# Altium PCB ECEN403.PcbDoc
Units mil, origin at the board's own origin, x right, y up, seen from the top; angles counter-clockwise.
Board outline 3500 x 2500 mil, 2 copper layers (Top Layer, Bottom Layer); 56 components, 33 nets, 154 pads, 31 vias.
Unrouted connection lines stored in the file: 42.
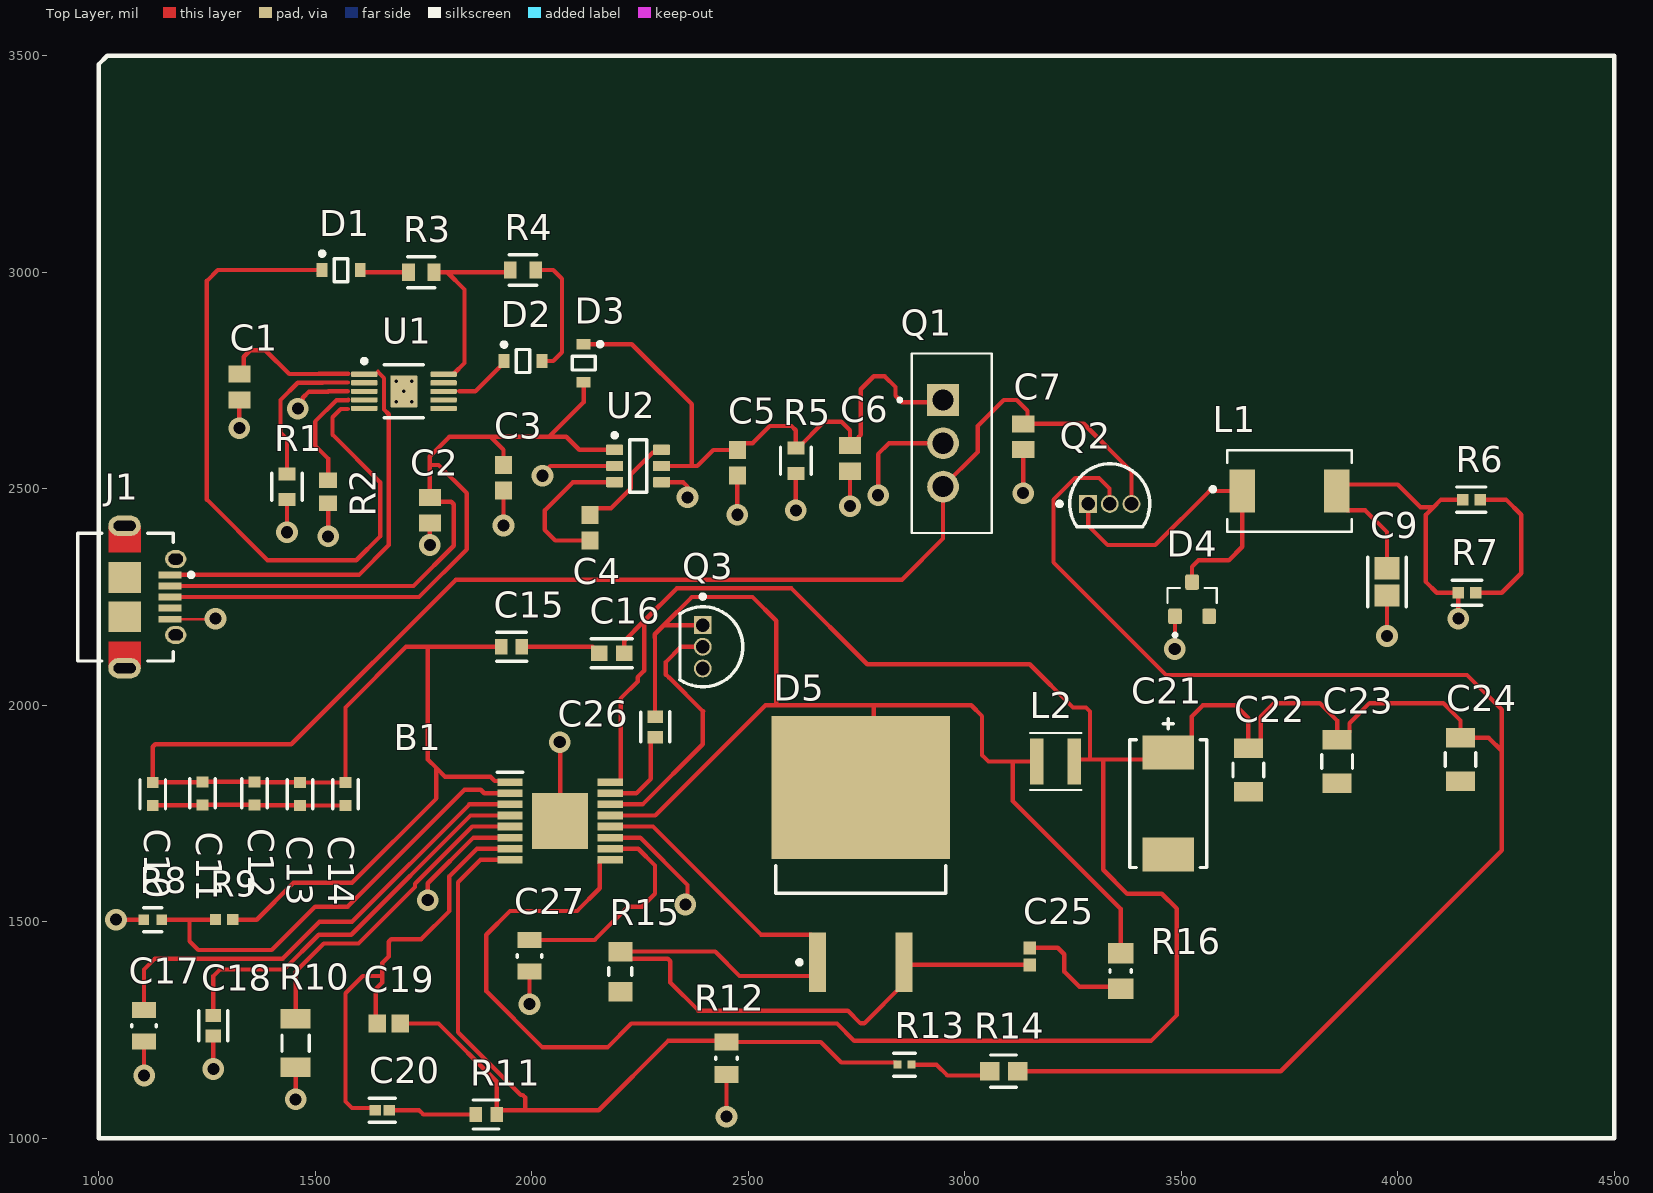
[diagram p0: Top Layer view]
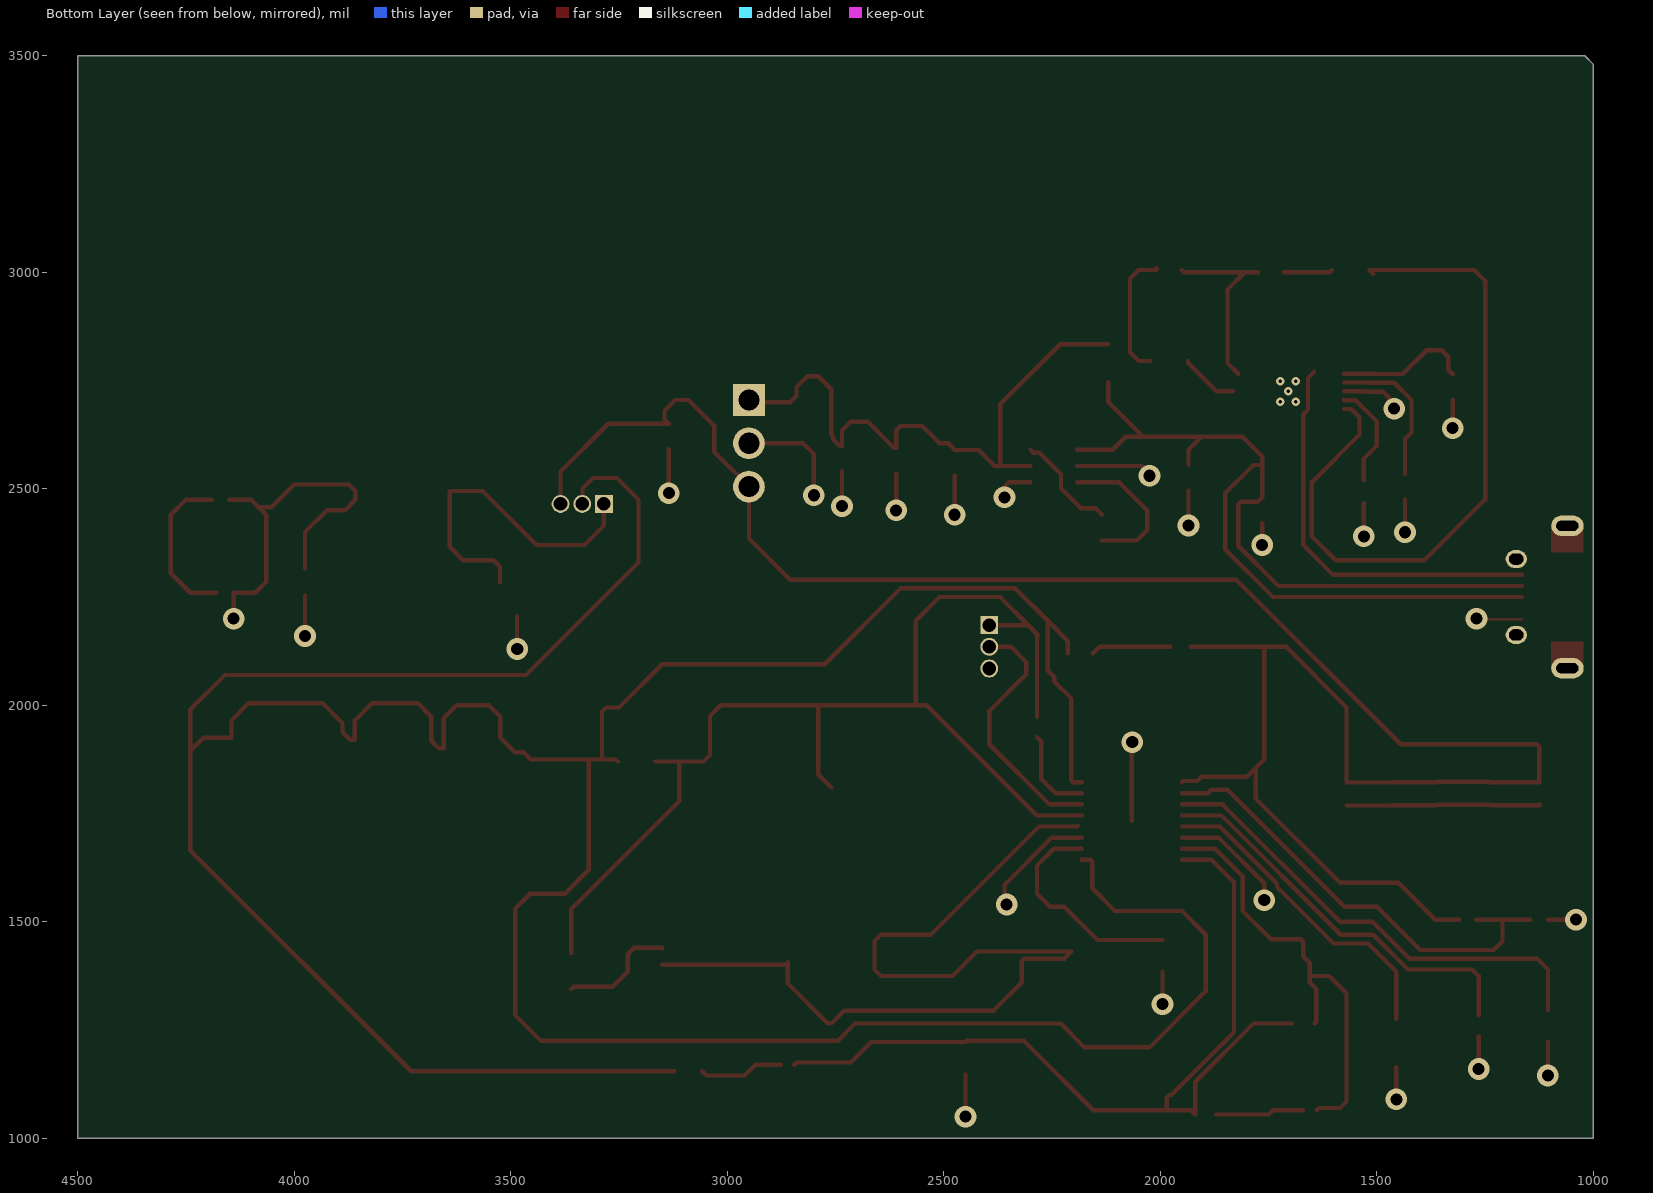
[diagram p1: Bottom Layer view, seen from below]
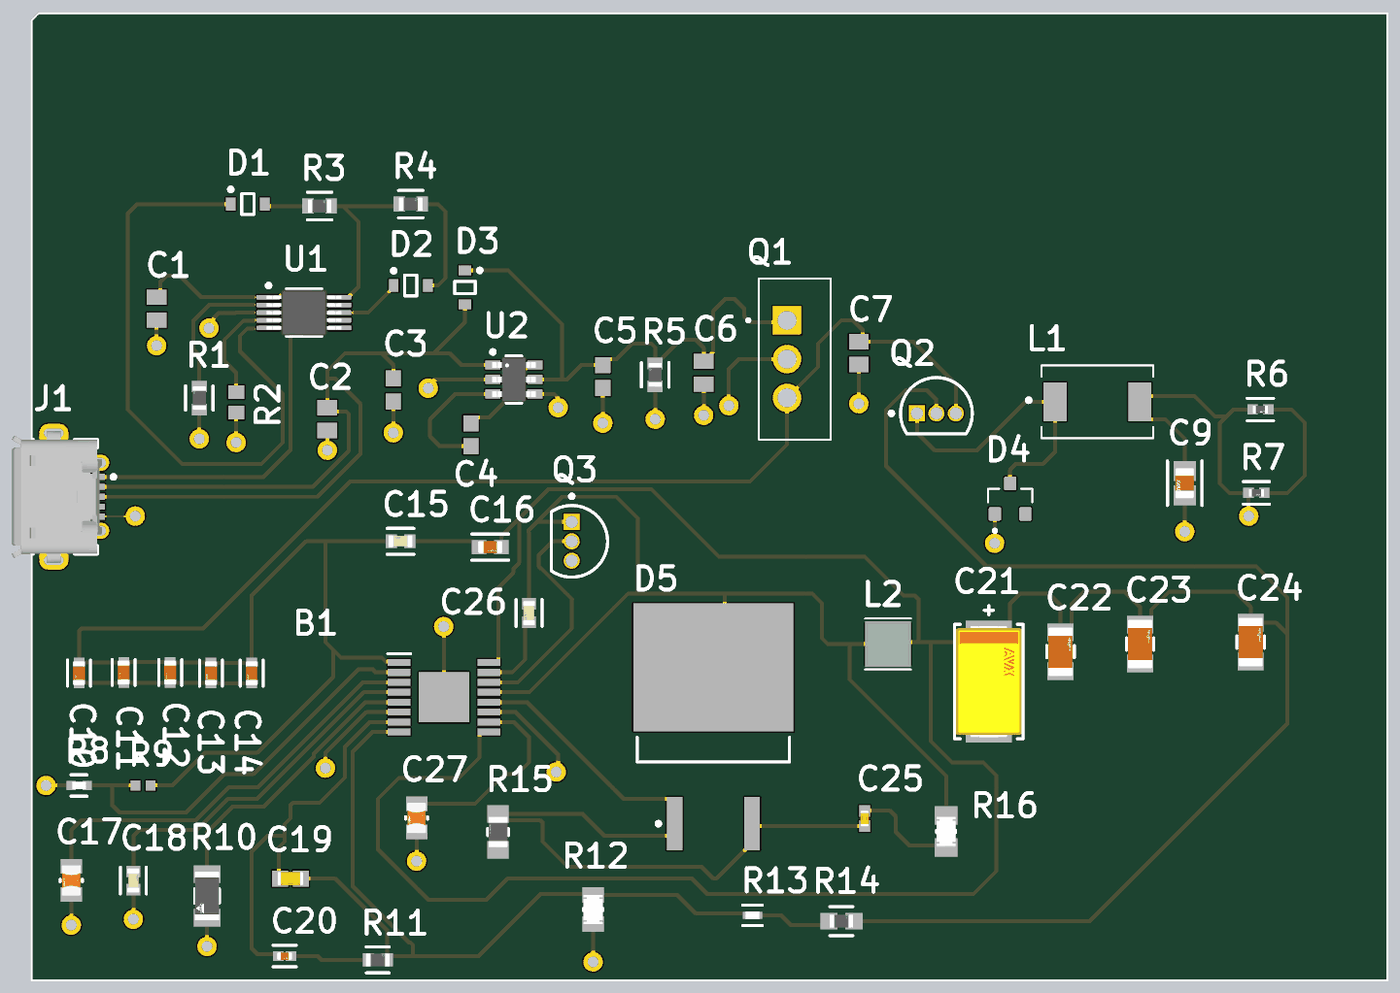
[diagram p2: 3D render of the assembled board from above, using the file's embedded part models]

## Layer stack, top to bottom
Top Solder: solder mask 0.4, Solder Resist, Dk 3.5
Top Layer: signal copper 1.4
Dielectric 1: dielectric 12.6, FR-4, Dk 4.8
Bottom Layer: signal copper 1.4
Bottom Solder: solder mask 0.4, Solder Resist, Dk 3.5

## Board outline
1000,1000 1000,3480 1020,3500 4500,3500 4500,1000

## Design rules (kind name [scope] priority, off if disabled: settings)
Clearance [All] p1 off: gap=10 ignorepadtopadclearanceinfootprint=FALSE except(0: Arc-Hole Track-Hole SMDPad-Hole THPad-Hole Via-Hole Fill-Hole Poly-Hole Region-Hole Text-Hole)
PolygonConnect [All] p1: connectstyle=Relief reliefconductorwidth=10 reliefentries=4 polygonreliefangle="90 Angle" airgapwidth=10
RoutingVias [All] p1: holewidth=28 width=50 viastyle="Through Hole" minholewidth=28 minwidth=50 maxholewidth=28 maxwidth=50
SolderMaskExpansion [All] p1: expansion=4 istentingtop=FALSE
Width [All] p1: maxlimit=15 minlimit=5 preferedwidth=10 bottomlayer_minwidth=10 bottomlayer_maxwidth=10 minimp=50.000000 maximp=50.000000 favimp=50.000000
30 further rules are at their usual default settings.

## Components (designator, comment, footprint, x,y, rotation, side; value= is the part's Value field where it differs from the comment)
B1 "LM5088MH-2_NOPB" SOP65P640X120-17N 2065.67,1732.8 r0 top
C1 "GRM21BR71H105KA12L" CAPC2013X135X45LL10T25 1325,2735 r90 top
C2 "GRM21BR71H105KA12L" CAPC2013X135X45LL10T25 1765,2450.47 r90 top
C3 "C0603C335M9PACTU" CAPC1608X90X35NL15T15 1935,2525.47 r90 top
C4 "C0603C335M9PACTU" CAPC1608X90X35NL15T15 2135,2410 r90 top
C5 "C0603C335M9PACTU" CAPC1608X90X35NL15T15 2475,2560 r90 top
C6 "GRM21BR71H105KA12L" CAPC2013X135X45LL10T25 2735,2570 r90 top
C7 "GRM21BR71H105KA12L" CAPC2013X135X45LL10T25 3135,2620.47 r90 top
C9 "0805ZD225KAT2A" FP-0805-L_2_01_0_2-W_1_25-IPC_B 3975,2285 r270 top
C10 "GRM188R71A225KE15D" FP-GRM188-0_1-e0_2_0_5-MFG 1125,1795 r270 top
C11 "GRM188R71A225KE15D" FP-GRM188-0_1-e0_2_0_5-MFG 1240,1796.57 r270 top
C12 "GRM188R71A225KE15D" FP-GRM188-0_1-e0_2_0_5-MFG 1360,1796.57 r270 top
C13 "GRM188R71A225KE15D" FP-GRM188-0_1-e0_2_0_5-MFG 1465,1795 r270 top
C14 "GRM188R71A225KE15D" FP-GRM188-0_1-e0_2_0_5-MFG 1570,1795 r270 top
C15 "C0603C104K5RACTU" FP-C0603C-CF-MFG 1953.62,2135 r0 top value="0.10 μF"
C16 "GRT188R61H105KE13D" FP-GRT188-0_1-e0_2_0_5-IPC_B 2185,2120 r0 top
C17 "CC0805KRX7R9BB223" FP-CC0805-0_85-MFG 1105,1260 r270 top value="22 nF"
C18 "C0603C271J5GACTU" FP-C0603C-CF-MFG 1265,1260 r270 top value="270 pF"
C19 "CC0603JRNPO9BN101" CAPC1608X90X40ML10T20 1670,1265 r0 top
C20 "0402YC153KAT2A" FP-0402-L_1_0_1-W_0_5_0_1-IPC_B 1655,1065 r0 top
C21 "TAJE477K010RNJ" FP-TAJE-MFG 3470,1773.11 r90 top
C22 "GRM31CR60J476ME19L" FP-GRM31C-0_2-e0_3_0_8-IPC_C 3655,1850.23 r90 top
C23 "GRM31CR60J476ME19L" FP-GRM31C-0_2-e0_3_0_8-IPC_C 3860,1870 r90 top
C24 "GRM31CR60J476ME19L" FP-GRM31C-0_2-e0_3_0_8-IPC_C 4145,1875 r90 top
C25 "GRM155R71H102KA01D" CAPC1005X55X25ML5T10 3150,1420 r90 top
C26 "C0603C104K5RACTU" FP-C0603C-CF-MFG 2285,1950 r90 top value="0.10 μF"
C27 "CC0805KRX7R9BB223" FP-CC0805-0_85-MFG 1995,1421.42 r270 top value="22 nF"
D1 "BAT54HT1G" ONSC-SOD-323-2-477-02_V 1560,3005 r0 top
D2 "BAT54HT1G" ONSC-SOD-323-2-477-02_V 1980,2795 r0 top
D3 "BAT54HT1G" ONSC-SOD-323-2-477-02_V 2120,2790 r270 top
D4 "SMS3922-001LF" TRANS_BSS159NH6327XTSA2 3525,2245 r90 top
D5 "MBRB2060CT" ONSC-D2PAK-3-418B-04_V 2760,1656.46 r90 top
J1 "47589-0001" MOLX-47589-0001_V 1119.06,2250 r270 top locked
L1 "AX97-10471" IND_AX97-10471 3750,2495 r0 top
L2 "LQH3NPN6R8MMEL" IND_LQH3NPN6R8MMEL 3210,1870 r0 top
Q1 "LM7805CT/NOPB" TO254P1054X470X1955-3 2950,2605 r270 top
Q2 "2N7000" ONSC-TO-92-3-29-11 3335,2465 r0 top
Q3 "2N7000" ONSC-TO-92-3-29-11 2395,2135 r270 top
R1 "CRCW06031K00FKEA" FP-CRCW0603-e3-MFG 1435,2504.53 r90 top
R2 "CRCW06032K00FKEA" RESC1609X50X30ML10T20 1530,2493.43 r90 top
R3 "CRCW06031K00FKEA" FP-CRCW0603-e3-MFG 1745,3000 r0 top
R4 "CRCW06031K00FKEA" FP-CRCW0603-e3-MFG 1980,3005 r0 top
R5 "CRCW06031K00FKEA" FP-CRCW0603-e3-MFG 2610,2564.53 r90 top
R6 "RG1005V-1401-W-T5" FP-RG1005-IPC_A 4170,2475 r0 top
R7 "RG1005V-1401-W-T5" FP-RG1005-IPC_A 4159.78,2260 r0 top
R8 "CRCW040216K2FKED" FP-CRCW0402-e3-MFG 1125,1505 r0 top
R9 "ERJ-2RKF5492X" RESC1005X40X25ML05T05 1290,1505 r0 top
R10 "CRCW120624K9FKEA" FP-CRCW1206-e3-IPC_B 1455,1220 r270 top
R11 "CRCW060318K2FKEA" FP-CRCW0603-e3-IPC_C 1895,1055 r0 top
R12 "CRCW08051K62FKEA" FP-CRCW0805-e3-IPC_B 2450,1185 r90 top
R13 "CRCW04025K11FKED" FP-CRCW0402-e3-IPC_C 2860.83,1170 r180 top
R14 "CRCW060310R0FKEA" FP-CRCW0603-e3-IPC_A 3090,1155 r0 top
R15 "CRF0805-FZ-R010ELF" FP-CRF0805-MFG 2205,1385 r90 top value=10mΩ
R16 "CRCW08055R11FKEA" FP-CRCW0805-e3-IPC_A 3360,1386.37 r270 top
U1 "BQ24093DGQR" DGQ0010D_M 1705,2725 r0 top
U2 "LM2681M6X/NOPB" DBV0006A_N 2245.87,2552.6 r0 top

## Footprints (in the part's own frame and the unit in brackets; to place one, negate y for a bottom-side part, rotate by r counter-clockwise, add the part's x,y. Pads: shape width x height; smd on the part's side, far side on the other; paste and mask are expansions set on the pad)
CAPC1005X55X25ML5T10 [mm] "Chip Capacitor, 2-Leads, Body 1.05x0.55mm, IPC Low Density"
  rect 0.76x0.72 smd: 1(-0.49,0) 2(0.49,0)
  body extent -0.53,-0.28 0.53,0.28, height 0.55
CAPC1608X90X35NL15T15 [mm] "Chip Capacitor, 2-Leads, Body 1.60x0.81mm, IPC Medium Density"
  rect 1.05x1 smd: 1(-0.75,0) 2(0.75,0)
  body extent -0.88,-0.48 0.87,0.48, height 0.9
CAPC1608X90X40ML10T20 [mm] "Chip Capacitor, 2-Leads, Body 1.7x0.9mm, IPC Low Density"
  rect 1.05x1.05 smd: 1(-0.675,0) 2(0.675,0)
  body extent -0.85,-0.45 0.85,0.45, height 0.9
CAPC2013X135X45LL10T25 [mm] "Chip Capacitor, 2-Leads, Body 2.00x1.25mm, IPC High Density"
  rect 1x1.3 smd: 1(-0.75,0) 2(0.75,0)
  body extent -1.05,-0.67 1.05,0.68, height 1.35
DBV0006A_N [mm] "SOT23, 6-Leads, Body 3.05x1.75mm, Pitch 0.95mm, IPC Medium Density"
  rrect17% 1x0.6 smd: 1(-1.375,0.95) 2(-1.375,0) 3(-1.375,-0.95) 4(1.375,-0.95) 5(1.375,0) 6(1.375,0.95)
  silkscreen extent -1.5,-1.55 0.5,1.92, body extent -1.42,-1.46 1.42,1.46, height 1.11
DGQ0010D_M [mm] "TSOP, 10-Leads, Body 3.1x3.1mm, Pitch 0.5mm, Thermal Pad 1.88x1.57mm, IPC Low Density"
  rrect33% 1.55x0.3 smd: 1(-2.325,1) 2(-2.325,0.5) 3(-2.325,0) 4(-2.325,-0.5) 5(-2.325,-1) 6(2.325,-1) 7(2.325,-0.5) 8(2.325,0) 9(2.325,0.5) 10(2.325,1)
  rrect6% 1.57x1.88 smd: 11(0,0)
  silkscreen extent -2.45,-1.55 1.15,1.9, body extent -2.45,-1.5 2.45,1.5, height 0.94
FP-0402-L_1_0_1-W_0_5_0_1-IPC_B [mil]
  rect 26.81x24.1 smd paste+0 mask+0: 1(-16.36,0) 2(16.36,0)
  silkscreen extent -30,-28 30,28, body extent -36,-18 36,18, height 10
FP-0805-L_2_01_0_2-W_1_25-IPC_B [mil]
  rect 51.36x57.33 smd paste+0 mask+0: 1(-31.72,0) 2(31.72,0)
  silkscreen extent -57,-44 57,44, body extent -67,-39 67,39, height 10
FP-C0603C-CF-MFG [mm]
  rect 0.75x0.9 smd paste+0 mask+0: 1(-0.6,0) 2(0.6,0)
  silkscreen extent -0.87,-0.85 0.88,0.85, body extent -1.2,-0.6 1.2,0.6, height 0.25
FP-CC0805-0_85-MFG [mm]
  rect 0.95x1.4 smd paste+0 mask+0: 1(-0.925,0) 2(0.925,0)
  silkscreen extent -0.08,-0.72 0.08,0.72, body extent -1.6,-1.05 1.6,1.05, height 0.25
FP-CRCW0402-e3-IPC_C [mil]
  rect 18.43x18.6 smd paste+0 mask+0: 1(-15.83,0) 2(15.83,0)
  silkscreen extent -25,-27 25,27, body extent -29,-15 29,15, height 10
FP-CRCW0402-e3-MFG [mm]
  rect 0.6x0.6 smd paste+0 mask+0: 1(-0.525,0) 2(0.525,0)
  silkscreen extent -0.53,-0.7 0.53,0.7, body extent -0.92,-0.4 0.92,0.4, height 0.25
FP-CRCW0603-e3-IPC_A [mil]
  rect 44.69x41.82 smd paste+0 mask+0: 1(-32.1,0) 2(32.1,0)
  silkscreen extent -30,-37 30,37, body extent -74,-41 74,41, height 10
FP-CRCW0603-e3-IPC_C [mil]
  rect 28.94x33.94 smd paste+0 mask+0: 1(-24.23,0) 2(24.23,0)
  silkscreen extent -30,-33 30,33, body extent -43,-23 43,23, height 10
FP-CRCW0603-e3-MFG [mm]
  rect 0.75x1 smd paste+0 mask+0: 1(-0.75,0) 2(0.75,0)
  silkscreen extent -0.8,-0.9 0.8,0.9, body extent -1.22,-0.6 1.22,0.6, height 0.25
FP-CRCW0805-e3-IPC_A [mil]
  rect 47.5x59.38 smd paste+0 mask+0: 1(-41.37,0) 2(41.37,0)
  silkscreen extent -3,-25 3,25, body extent -85,-49 85,49, height 10
FP-CRCW0805-e3-IPC_B [mil]
  rect 39.63x55.44 smd paste+0 mask+0: 1(-37.44,0) 2(37.44,0)
  silkscreen extent -3,-25 3,25, body extent -67,-38 67,38, height 10
FP-CRCW1206-e3-IPC_B [mil]
  rect 45.51x69.22 smd paste+0 mask+0: 1(-56.14,0) 2(56.14,0)
  silkscreen extent -19,-31 19,31, body extent -89,-44 89,44, height 10
FP-CRF0805-MFG [mm]
  rect 1.15x1.4 smd paste+0 mask+0: 1(-1.175,0) 2(1.175,0)
  silkscreen extent -0.23,-0.67 0.23,0.67, body extent -1.85,-0.8 1.85,0.8, height 0.25
FP-GRM31C-0_2-e0_3_0_8-IPC_C [mil]
  rect 45.46x67.17 smd paste+0 mask+0: 1(-50.23,0) 2(50.23,0)
  silkscreen extent -16,-35 16,35, body extent -77,-39 77,39, height 10
FP-GRM188-0_1-e0_2_0_5-MFG [mm]
  rect 0.65x0.7 smd paste+0 mask+0: 1(-0.675,0) 2(0.675,0)
  silkscreen extent -0.85,-0.75 0.85,0.75, body extent -1.1,-0.55 1.1,0.55, height 0.25
FP-GRT188-0_1-e0_2_0_5-IPC_B [mil]
  rect 37.74x35.91 smd paste+0 mask+0: 1(-28.61,0) 2(28.61,0)
  silkscreen extent -47,-34 47,34, body extent -57,-28 57,28, height 10
FP-RG1005-IPC_A [mil]
  rect 27.12x26.48 smd paste+0 mask+0: 1(-20.22,0) 2(20.22,0)
  silkscreen extent -34,-29 34,29, body extent -42,-21 42,21, height 10
FP-TAJE-MFG [mm]
  rect 2x3 smd paste+0 mask+0: 1(-3,0) 2(3,0)
  silkscreen extent -3.75,-2.25 4.97,2.25, body extent -4.1,-2.35 4.1,2.35, height 0.25
IND_AX97-10471 [mm]
  rect 1.5x2.54 smd: 1(-2.77,0) 2(2.77,0)
  silkscreen extent -4.6,-2.39 3.65,2.39
IND_LQH3NPN6R8MMEL [mm]
  rect 0.8x2.7 smd: 1(-1.1,0) 2(1.1,0)
  silkscreen extent -1.5,-1.67 1.5,1.67, body extent -1.5,-1.5 1.5,1.5, height 1.5
MOLX-47589-0001_V [mm] "SMD, 5-Leads, Body 7.5x5.6mm, Pitch 0.65mm"
  rect 0.4x1.35 smd: 1(-1.3,1.175) 2(-0.65,1.175) 3(0,1.175) 4(0.65,1.175) 5(1.3,1.175)
  oval 1.05x1.25 hole 0.65 slot 0.85 at 90 deg: 6(-2.225,1.5) 7(2.225,1.5)
  oval 1.2x1.9 hole 0.6 slot 1.3 at 90 deg: 8(-4.175,-1.5) 11(4.175,-1.5)
  rect 1.8x1.9 smd: 9(-1.15,-1.5) 10(1.15,-1.5)
  Top Layer region: -2.6,-0.55 -4.175,-0.55 -4.175,-2.45 -2.6,-2.45
  Top Layer region: 2.6,-2.45 4.175,-2.45 4.175,-0.55 2.6,-0.55
  silkscreen extent -3.75,-4.25 3.75,2.53, body extent -4.32,-4.25 4.32,1.64, height 2.74
ONSC-D2PAK-3-418B-04_V [mm] "DPAK, 3-Leads, Body 9.97x9.145mm, Pitch 2.54mm"
  rect 3.504x1.016 smd: 1(-6.35,2.54) 3(-6.35,-2.54)
  rect 8.38x10.49 smd: 4(3.9,0)
  silkscreen extent -6.47,-4.98 -0.69,4.98, body extent -2.3,-4.98 6.85,4.98, height 4.83
ONSC-SOD-323-2-477-02_V [mm] "SOD, 2-Leads, Body 1.7x1.25mm"
  rect 0.63x0.83 smd: 1(-1.115,0) 2(1.115,0)
  silkscreen extent -1.24,-0.67 0.4,1.09, body extent -0.85,-0.63 0.85,0.63, height 1.06
ONSC-TO-92-3-29-11 [mm] "TO, 3-Leads, Body Dia 4.7mm, Pitch 1.27mm"
  rect 1.05x1.05 hole 0.8: 1(-1.27,0)
  round 1.05 hole 0.8: 2(0,0) 3(1.27,0)
  silkscreen extent -3.07,-1.34 2.35,2.35, body extent -2.35,-1.33 2.36,2.36, height 7.87
RESC1005X40X25ML05T05 [mm] "Chip Resistor, 2-Leads, Body 1.00x0.50mm, IPC Low Density"
  rect 0.65x0.65 smd: 1(-0.5,0) 2(0.5,0)
  body extent -0.53,-0.27 0.53,0.28, height 0.4
RESC1609X50X30ML10T20 [mm] "Chip Resistor, 2-Leads, Body 1.55x0.85mm, IPC Low Density"
  rect 0.9x1.05 smd: 1(-0.675,0) 2(0.675,0)
  body extent -0.82,-0.48 0.82,0.48, height 0.5
SOP65P640X120-17N [mm]
  rect 1.475x0.45 smd: 1(-2.938,2.275) 2(-2.938,1.625) 3(-2.938,0.975) 4(-2.938,0.325) 5(-2.938,-0.325) 6(-2.938,-0.975) 7(-2.938,-1.625) 8(-2.938,-2.275) 9(2.938,-2.275) 10(2.938,-1.625) 11(2.938,-0.975) 12(2.938,-0.325) 13(2.938,0.325) 14(2.938,0.975) 15(2.938,1.625) 16(2.938,2.275)
  rect 3.3x3.3 smd: 17(0,0)
  silkscreen extent -3.67,2.85 -2.2,2.85, body extent -10,-3.38 10,3.38, height 5.8
TO254P1054X470X1955-3 [mm]
  rect 1.86x1.86 hole 1.24: 1(-2.54,0)
  round 1.86 hole 1.24: 2(0,0) 3(2.54,0)
  silkscreen extent -5.27,-2.64 5.27,2.86
TRANS_BSS159NH6327XTSA2 [mm]
  rrect25% 0.9x0.8 smd: 1(-1,1) 2(-1,-1) 3(1,0)
  silkscreen extent -2.2,-1.45 0.65,1.45

## Part data
B1: "Texas Instruments LM5088MH-2/NOPB, DC-DC Controller, 75 V Step-Down, Non-Synchronous, 1000 kHz, 16-Pin, TSSOP", Manufacturer_Name="Texas Instruments", Manufacturer_Part_Number=LM5088MH-2/NOPB, Mouser Part Number=926-LM5088MH-2/NOPB, Datasheet Link=http://www.ti.com/lit/gpn/lm5088, Geometry.Height=1.2mm, Mouser Price/Stock=https://www.mouser.co.uk/ProductDetail/Texas-Instruments/LM5088MH-2-NOPB?qs=QbsRYf82W3HnqvKQAYh%2FLg%3D%3D
C1 C2 C6 C7: library part CMP-1036-04761-2, Manufacturer=Murata, Part Number=GRM21BR71H105KA12L
C3 C4 C5: library part CMP-1035-02770-2, Manufacturer=Kemet, Part Number=C0603C335M9PACTU
C9: library part CMP-2000-05810-2, "General Purpose Ceramic Capacitor, 0805, 2.2uF, 10%, X5R, 15%, 10V", Capacitance=2.2uF, Case Code (Imperial)=0805, Case Code (Metric)=2012, Dielectric=X5R, Dielectric Material=Ceramic, Insulation Resistance=500MR, Max Operating Temperature=85°C, Min Operating Temperature=-55°C, Package Quantity=1, Tolerance=10%, Voltage=10V, Case/Package=0805, Construction=Flat, Contact Plating=Tin, Depth=1.25mm, Dissipation Factor=5%, Height=1.4mm, Lead Free="Lead Free", Length=2.01mm, Mount="Surface Mount", Number of Pins=2, Packaging="Tape and Reel", Radiation Hardening=No, REACH SVHC="No SVHC", RoHS Compliant=Yes, Series=-, Size=1.4mm, Termination=SMD/SMT, Thickness=0.055inch, Voltage Rating=10V, Voltage Rating (DC)=10V, Width=0.049inch
C10 C11 C12 C13 C14: library part CMP-2006-02836-2, "Chip Multilayer Ceramic Capacitors for General Purpose, 0603, 2.2uF, X7R, 15%, 10%, 10V", Capacitance=2.2uF, Case Code (Imperial)=0603, Case Code (Metric)=1608, Dielectric=X7R, Max Operating Temperature=125°C, Min Operating Temperature=-55°C, Package Quantity=1, Tolerance=10%, Voltage=10V, Case/Package=0603, Depth=0.8mm, Height=0.8mm, Lead Free="Lead Free", Length=1.6mm, Material=Ceramic, Mount="Surface Mount", Number of Pins=2, Packaging="Cut Tape", REACH SVHC="No SVHC", Termination=SMD/SMT, Thickness=0.035inch, Voltage Rating=10V, Voltage Rating (DC)=10V, Weight=7.1E-05oz, Width=0.031inch
C15 C26: library part CMP-2006-03061-2, "CAP CER 0.1UF 50V X7R 0603", Capacitance="0.10 μF", Manufacturer=KEMET, Package=C0603C-CF, Temperature="-55°C to +125°C", Temperature Characteristic=X7R, Temperature Coefficient=30ppm/°C, Temperature Range High=+125°C, Temperature Range Low=-55°C, Tolerance=0.1, Voltage Rating="50 V", Automotive=Yes, Automotive Grade="Grade 1", Category=Cap, ComponentLink2Description=Datasheet, ComponentLink2URL=https://api.kemet.com/component-edge/download/datasheet/C0603C100J5GACAUTO.pdf, Device Class L1="Passive Components", Device Class L2=Capacitors, Device Class L3="Ceramic Capacitors", Digikey Description="CAP CER 0.1UF 50V X7R 0603", Height=0.87mm, Lead Free=Yes, Manufacturer Part Number=C0603C104K5RACTU, Material=Ceramic, Octopart=https://octopart.com/c0603c104k5ractu-kemet-139244, RoHS=TRUE
C16: library part CMP-06035-031856-1, "Multi-Layer Ceramic Capacitor 1uF 50V X5R ±10% 0603 Paper T/R", Capacitance=1uF, Case Code (Imperial)=0603, Case Code (Metric)=1608, Dielectric=X5R, Max Operating Temperature=85°C, Min Operating Temperature=-55°C, Ratings=AEC-Q200, Tolerance=10%, Voltage Rating=50V, Case/Package=0603, Length=0.063inch, Mount="Surface Mount", Packaging="Tape and Reel", Thickness=0.035inch, Voltage Rating (DC)=50V, Width=0.031inch
C17 C27: library part CMP-1036-04064-2, "CAP CER 0.022UF 50V X7R 0805", Capacitance="22 nF", Manufacturer=Yageo, Package=CC0805-0.85, Temperature="-30°C to +85°C", Temperature Characteristic=X7R, Temperature Range High=+85°C, Temperature Range Low=-30°C, Tolerance=0.1, Voltage Rating="50 V", Automotive=No, Category=Cap, ComponentLink2Description=Datasheet, ComponentLink2URL=http://www.yageo.com/documents/recent/UPY-GPHC_Y5V_6.3V-to-50V_8.pdf, Device Class L1="Passive Components", Device Class L2=Capacitors, Device Class L3="Ceramic Capacitors", Digikey Description="CAP CER 0.022UF 50V X7R 0805", Footprint Url=http://www.yageo.com/exep/pages/download/literatures/UPY-C_GEN_24.pdf, Height=0.95mm, Ipc Land Pattern Name=CAPC200125X85, Lead Free=Yes, Manufacturer Part Number=CC0805KRX7R9BB223, Material=Ceramic, Mouser Description="Multilayer Ceramic Capacitors MLCC - SMD/SMT 22nF 50V X7R 10%", Octopart=https://octopart.com/cc0805krx7r9bb223-yageo-39467761, RoHS=TRUE
C18: library part CMP-2006-03310-2, "CAP CER 270PF 50V C0G/NP0 0603", Capacitance="270 pF", Manufacturer=KEMET, Package=C0603C-CF, Temperature="-55°C to +125°C", Temperature Characteristic=C0G, Temperature Coefficient=30ppm/°C, Temperature Range High=+125°C, Temperature Range Low=-55°C, Tolerance=0.05, Voltage Rating="50 V", Automotive=Yes, Automotive Grade="Grade 1", Category=Cap, ComponentLink2Description=Datasheet, ComponentLink2URL=https://api.kemet.com/component-edge/download/datasheet/C0603C100J5GACAUTO.pdf, Device Class L1="Passive Components", Device Class L2=Capacitors, Device Class L3="Ceramic Capacitors", Digikey Description="CAP CER 270PF 50V C0G/NP0 0603", Height=0.87mm, Lead Free=Yes, Manufacturer Part Number=C0603C271J5GACTU, Material=Ceramic, Mouser Description="Multilayer Ceramic Capacitors MLCC - SMD/SMT 50volts 270pF C0G 5%", Octopart=https://octopart.com/c0603c271j5gactu-kemet-136709, RoHS=TRUE
C19: library part CMP-2100-03594-1, "Chip Capacitor, 100 pF, +/- 5%, 50 V, -55 to 125 degC, 0603 (1608 Metric), RoHS, Tape and Reel", Capacitance=100pF, Case Code (Imperial)=0603, Case Code (Metric)=1608, Dielectric=C0G, Insulation Resistance=100GR, Manufacturer=Yageo, Max Operating Temperature=125degC, Min Operating Temperature=-55degC, Package Description="2-Pin Surface Mount Device, Body 1.6 x 0.8 mm", Package Quantity=1, Temperature Coefficient=30ppm/degC, Tolerance=5%, Voltage=50V, Case/Package=0603, Composition=Ceramic, Datasheet URL=http://www.yageo.com/documents/recent/UPY-GP_NP0_16V-to-50V_14.pdf, Datasheet Version="Rev. 14, 07/2016", Depth=0.8mm, Height=0.8mm, Lead Free=LeadFree, Length=1.6mm, Manufacturer URL=http://www.yageo.com/, Mount=SurfaceMount, Number of Pins=2, Package Reference=0603, Packaging=TapeandReel, Radiation Hardening=No, REACH SVHC=Unknown, RoHSCompliant=True, Termination=SMD/SMT, Thickness=0.035inch, Voltage Rating=50V, Voltage Rating (DC)=50V, Width=0.8mm
C20: library part CMP-2008-02809-2, "General Purpose Ceramic Capacitor, 0402, 15nF, 10%, X7R, 15%, 16V", Capacitance=15nF, Case Code (Imperial)=0402, Case Code (Metric)=1005, Dielectric=X7R, Max Operating Temperature=125°C, Min Operating Temperature=-55°C, Package Quantity=1, Tolerance=10%, Voltage=16V, Case/Package=0402, Construction=Flat, Contact Plating=Tin, Depth=0.5mm, Height=0.56mm, Lead Free="Lead Free", Length=1mm, Mount="Surface Mount", Number of Pins=2, Packaging="Tape and Reel", Radiation Hardening=No, REACH SVHC="No SVHC", RoHS Compliant=Yes, Series=-, Termination=SMD/SMT, Thickness=0.022inch, Voltage Rating=16V, Voltage Rating (DC)=16V, Width=0.5mm
C21: library part CMP-04424-000243-1, "470uF 10V  ±10% 500mΩ 2917  SMD Tantalum Capacitor", Capacitance=470uF, Case Code (Imperial)=2917, Case Code (Metric)=7343, Dielectric Material=Tantalum, ESR (Equivalent Series Resistance)=500mR, Leakage Current=47uA, Max Operating Temperature=125°C, Min Operating Temperature=-55°C, Package Quantity=1, Tolerance=10%, Voltage=10V, Case/Package=2917, Construction=Flat, Depth=4.3mm, Dissipation Factor=10%, Features="General Purpose", Height=4.1mm, Height - Seated (Max)=0.169inch, Lead Free="Lead Free", Lead Pitch=4.4mm, Length=7.3mm, Mount="Surface Mount", Number of Pins=2, Packaging="Tape and Reel", Polarity=Polar, Radiation Hardening=No, REACH SVHC="No SVHC", RoHS Compliant=Yes, Series=TAJ, Termination=SMD/SMT, Voltage Rating=10V, Voltage Rating (DC)=10V, Width=4.3mm
C22 C23 C24: library part CMP-2000-06344-2, "Chip Multilayer Ceramic Capacitors for General Purpose, 1206, 47uF, X5R, 15%, 20%, 6.3V", Capacitance=47uF, Case Code (Imperial)=1206, Case Code (Metric)=3216, Dielectric=X5R, Max Operating Temperature=85°C, Min Operating Temperature=-55°C, Package Quantity=2000, Tolerance=20%, Voltage=6.3V, Case/Package=1206, Depth=1.6mm, Height=1.6mm, Lead Free="Lead Free", Length=3.2mm, Material=Ceramic, Mount="Surface Mount", Packaging="Tape and Reel", Radiation Hardening=No, REACH SVHC="No SVHC", Termination=SMD/SMT, Thickness=0.071inch, Voltage Rating=6.3V, Voltage Rating (DC)=6.3V, Width=0.063inch
C25: library part CMP-1662-00017-1, "Chip Capacitor, 1 nF, +/- 10%, 50 V, -55 to 125 degC, 0402 (1005 Metric), RoHS, Tape and Reel", Capacitance="1 nF", Case Code (Imperial)=0402, Case Code (Metric)=1005, Max Operating Temperature="125 degC", Min Operating Temperature="-55 degC", Package Quantity=10000, Tolerance=10%, Type (Capacitors)=X7R, Voltage Rating="50 V", Case\/Package=0402, ComponentLink1Description="Manufacturer URL", ComponentLink1URL=http://www.murata.com/, ComponentLink2Description=Datasheet, ComponentLink2URL=http://psearch.en.murata.com/capacitor/product/GRM155R71H102KA01%23.pdf, DatasheetVersion=07/2016, Height="0.5 mm", Length="1 mm", Mount="Surface Mount", Mounting Technology="Surface Mount", PackageDescription="2-Pin Surface Mount Device, Body 1 x 0.5 mm", PackageReference=0402, Packaging="Tape and Reel", Pins=2, Radiation Hardening=No, REACH SVHC="No SVHC", RoHSCompliant=true, Voltage Rating (DC)="50 V", Width="0.5 mm"
D1 D2 D3: library part CMP-1055-00462-1, "Schottky Barrier Diode, 2-Pin SOD-323, Pb-Free, Tape and Reel", Manufacturer="On Semiconductor", ComponentLink1Description="Manufacturer URL", ComponentLink1URL=http://www.onsemi.com/, ComponentLink2Description=Datasheet, ComponentLink2URL=http://www.onsemi.cn/pub_link/Collateral/BAT54HT1-D.PDF, ComponentLink3Description="Package Specification", ComponentLink3URL=http://www.onsemi.com/pub_link/Collateral/477-02.PDF.1, Configuration=Single, DatasheetVersion="Rev. 6", IFSM Max (A)=0.6, Mounting Technology="Surface Mount", PackageDescription="2-Pin SOD, Body 1.7 x 1.25 mm", PackageReference=SOD-323-2-477-02, PackageVersion="Rev. H, 03/2007", Packing="Tape and Reel", PartNumber=BAT54HT1G, RoHS=TRUE, trr Max (ns)=5
D4: "Schottky Diodes & Rectifiers Ls=1.5nH SOT-23 Single", Manufacturer_Name=Skyworks, Mouser Part Number=873-SMS3922-001LF, Datasheet Link=https://datasheet.datasheetarchive.com/originals/distributors/DKDS41/DSANUWW0028418.pdf, Geometry.Height=1.12mm, Manufacturer_Part_Number=SMS3922-001LF, Mouser Price/Stock=https://www.mouser.co.uk/ProductDetail/Skyworks-Solutions-Inc/SMS3922-001LF?qs=WMHGlxXAKT974McT9yqRxw%3D%3D
D5: library part CMP-1055-00108-1, "SWITCHMODE(TM) Power Rectifier, 3-Pin D2PAK, Tube", Manufacturer="On Semiconductor", ComponentLink1Description="Manufacturer URL", ComponentLink1URL=http://www.onsemi.com/, ComponentLink2Description=Datasheet, ComponentLink2URL=http://www.onsemi.cn/pub_link/Collateral/MBRB2060CT-D.PDF, ComponentLink3Description="Package Specification", ComponentLink3URL=http://www.onsemi.com/pub_link/Collateral/418B-04.PDF, Configuration="Common Cathode", DatasheetVersion="Rev. 9", IFSM Max (A)=150, Mounting Technology="Surface Mount", PackageDescription="3-Pin Flange Mount, Body 9.145 x 9.97 mm, Pitch 2.54 mm", PackageReference=D2PAK-3-418B-04, PackageVersion="Rev. K, 09/2008", Packing=Tube, PartNumber=MBRB2060CT, RoHS=FALSE
J1: library part CMP-2000-05610-1, "Right Angle Female Type AB Micro USB Connector, 30 V, 1.8 A, -30 to 85 degC, RoHS, Tape and Reel", Color=Black, Current Rating=1.8A, Manufacturer=Molex, Operating Temperature Range=-20Cto+85C, Package Description="Micro USB Connector, Pitch 0.65 mm, 5 Positions, Body 7.5 x 5.6 mm", Voltage Rating=30VAC, Brand=Molex, Connector Type=MicroUSBTypeABreceptacle, Contact Material=CopperAlloy, Contact Plating=Gold, Datasheet URL=http://www.molex.com/webdocs/datasheets/pdf/en-us/0475890001_IO_CONNECTORS.pdf, Datasheet Version=12/2016, Gender=Female, Manufacturer URL=http://www.molex.com/, Mounting Angle=Right, Mounting Technology=SurfaceMount, Number of Contacts=5Contact, Number of Ports=1Port, Package Reference=47589-0001, Package URL=http://www.molex.com/pdm_docs/sd/475890001_sd.pdf, Packaging=Reel, Product=MicroUSBTypeABConnectors, Product Category=USBConnectors, RoHS=True, Series=47589, Standard=USB, Termination Style=SMD/SMT
L1: "AX97 Series 470 uH Â±20% Tolerance 0.12 A Unshielded Surface Mount Power Inductor", Package=None, Availability=Unavailable, MP=AX97-10471, Price=None
L2: "Inductor with Inductance: 6.8uH Tol. +/-20%, Package: 1212 (3030)", Package=NONSTANDARD, Availability="In Stock", Check_prices=https://www.snapeda.com/parts/LQH3NPN6R8MMEL/Murata/view-part/?ref=eda, MF=Murata, MP=LQH3NPN6R8MMEL, Price=None, Purchase-URL=https://pricing.snapeda.com/search/part/LQH3NPN6R8MMEL/?ref=eda, SnapEDA_Link=https://www.snapeda.com/parts/LQH3NPN6R8MMEL/Murata/view-part/?ref=snap
Q1: Package=None, Availability=Unavailable, MP=LM7805CT/NOPB, Price=None
Q2 Q3: library part CMP-1058-00936-1, "Small Signal MOSFET, 200 mA, 60 V, N-Channel, 3-Pin TO-92, Bulk Box", Manufacturer="On Semiconductor", Package Type=TO-92, Channel Polarity="N Channel", Ciss Typ (pF)=60, ComponentLink1Description="Manufacturer URL", ComponentLink1URL=http://www.onsemi.com/, ComponentLink2Description=Datasheet, ComponentLink2URL=http://www.onsemi.com/pub_link/Collateral/2N7000-D.PDF, ComponentLink3Description="Package Specification", ComponentLink3URL=http://www.onsemi.cn/pub_link/Collateral/2N6426-D.PDF, Configuration=Single, Coss Typ (pF)=25, Crss Typ (pF)=5, DatasheetVersion="Rev. 8", ID Max (A)=0.2, Mounting Technology="Through Hole", PackageDescription="3-Pin Transistor Outline, Body 4.825 x 3.685 mm, Pitch 1.27 mm", PackageReference=TO-92-3-29-11_AM_SL, PackageVersion="Rev. AM", Packing="Bulk Box", PartNumber=2N7000, PD Max (W)=0.35, V(BR)DSS Min (V)=60, VGS Max (V)=20, VGS(th) Max (V)=3
R1 R3 R4 R5: library part CMP-1666-00003-5, "RES Thick Film, 1kΩ, 1%, 0.1W, 100ppm/°C, 0603", Case Code (Imperial)=0603, Case Code (Metric)=1608, Max Operating Temperature=155°C, Max Power Dissipation=100mW, Min Operating Temperature=-55°C, Package Quantity=10, Resistance=1kR, Temperature Coefficient=100ppm/°C, Tolerance=1%, Voltage Rating=75V, Case/Package=0603, Composition="Thick Film", Contact Plating=Tin, Depth=0.85mm, Features="Automotive AEC-Q200", Height=0.45mm, Lead Free="Lead Free", Length=1.55mm, Military Standard=Not, Mount="Surface Mount", Number of Pins=2, Number of Terminations=2, Packaging="Tape and Reel", Power Rating=100mW, Radiation Hardening=No, Termination=SMD/SMT, Voltage Rating (DC)=75V, Weight=7.1E-05oz, Width=0.033inch
R2: library part CMP-2000-03159-1, Manufacturer="Vishay Dale", Part Number=CRCW06032K00FKEA
R6 R7: library part CMP-28537-002299-1, "Automotive Metal Thin Film Chip Resistor, 0402, 1.4kΩ, 0.05%, 5ppm/°C, 0.0625W, 75V", Case Code (Imperial)=0402, Case Code (Metric)=1005, Max Operating Temperature=155°C, Max Power Dissipation=63mW, Min Operating Temperature=-55°C, Package Quantity=5000, Power Rating=30mW, Resistance=1.4kR, Resistor Type="Thin Film", Temperature Coefficient=5ppm/°C, Tolerance=0.05%, Voltage Rating=25V, Case/Package=0402, Features="Automotive AEC-Q200", Height=0.35mm, Lead Free="Lead Free", Length=1mm, Number of Terminations=2, Packaging="Tape and Reel", RoHS Compliant=Yes, Series=RG, Termination=SMD/SMT, Voltage Rating (DC)=25V, Width=0.5mm
R8: library part CMP-1011-00645-3, "RES Thick Film, 16.2kΩ, 1%, 0.063W, 100ppm/°C, 0402", Case Code (Imperial)=0402, Case Code (Metric)=1005, Max Operating Temperature=155°C, Max Power Dissipation=63mW, Min Operating Temperature=-55°C, Package Quantity=10, Resistance=16.2kR, Temperature Coefficient=100ppm/°C, Tolerance=1%, Voltage Rating=50V, Case/Package=0402, Composition="Thick Film", Contact Plating=Tin, Depth=0.5mm, Features="Automotive AEC-Q200", Height=0.35mm, Lead Free="Lead Free", Length=1mm, Military Standard=Not, Number of Pins=2, Number of Terminations=2, Packaging="Tape and Reel", Power Rating=63mW, Radiation Hardening=No, Termination=SMD/SMT, Voltage Rating (DC)=50V, Weight=2.3E-05oz, Width=0.02inch
R9: library part CMP-2002-00991-1, Manufacturer=Panasonic, Part Number=ERJ-2RKF5492X
R10: library part CMP-2003-01990-2, "RES Thick Film, 24.9kΩ, 1%, 0.25W, 100ppm/°C, 1206", Case Code (Imperial)=1206, Case Code (Metric)=3216, Max Operating Temperature=155°C, Max Power Dissipation=250mW, Min Operating Temperature=-55°C, Package Quantity=10, Resistance=24.9kR, Temperature Coefficient=100ppm/°C, Tolerance=1%, Voltage Rating=200V, Case/Package=1206, Composition="Thick Film", Contact Plating=Tin, Depth=1.6mm, Features="Automotive AEC-Q200", Height=0.55mm, Lead Free="Lead Free", Length=3.2mm, Military Standard=Not, Number of Pins=2, Number of Terminations=2, Packaging="Tape and Reel", Power Rating=250mW, Radiation Hardening=No, Termination=SMD/SMT, Voltage Rating (DC)=200V, Weight=0.000353oz, Width=0.063inch
R11: library part CMP-2000-02961-2, "RES Thick Film, 18.2kΩ, 1%, 0.1W, 100ppm/°C, 0603", Case Code (Imperial)=0603, Case Code (Metric)=1608, Max Operating Temperature=155°C, Max Power Dissipation=100mW, Min Operating Temperature=-55°C, Package Quantity=10, Resistance=18.2kR, Temperature Coefficient=100ppm/°C, Tolerance=1%, Voltage Rating=75V, Case/Package=0603, Composition="Thick Film", Contact Plating=Tin, Depth=0.85mm, Features="Automotive AEC-Q200", Height=0.45mm, Lead Free="Lead Free", Length=1.55mm, Military Standard=Not, Number of Pins=2, Number of Terminations=2, Packaging="Tape and Reel", Power Rating=100mW, Radiation Hardening=No, Termination=SMD/SMT, Voltage Rating (DC)=75V, Weight=7.1E-05oz, Width=0.85mm, Working Voltage=75V
R12: library part CMP-2001-04317-2, "RES Thick Film, 1.62kΩ, 1%, 0.125W, 100ppm/°C, 0805", Case Code (Imperial)=0805, Case Code (Metric)=2012, Max Operating Temperature=155°C, Max Power Dissipation=125mW, Min Operating Temperature=-55°C, Package Quantity=10, Resistance=1.62kR, Temperature Coefficient=100ppm/°C, Tolerance=1%, Voltage Rating=150V, Case/Package=0805, Composition="Thick Film", Contact Plating=Tin, Depth=1.25mm, Features="Automotive AEC-Q200", Height=0.45mm, Lead Free="Lead Free", Length=2mm, Military Standard=Not, Number of Pins=2, Number of Terminations=2, Packaging="Tape and Reel", Power Rating=125mW, Radiation Hardening=No, Termination=SMD/SMT, Voltage Rating (DC)=150V, Weight=0.000194oz, Width=0.049inch
R13: library part CMP-2002-00117-2, "RES Thick Film, 5.11kΩ, 1%, 0.063W, 100ppm/°C, 0402", Case Code (Imperial)=0402, Case Code (Metric)=1005, Max Operating Temperature=155°C, Max Power Dissipation=63mW, Min Operating Temperature=-55°C, Package Quantity=10, Resistance=5.11kR, Temperature Coefficient=100ppm/°C, Tolerance=1%, Voltage Rating=50V, Case/Package=0402, Composition="Thick Film", Contact Plating=Tin, Depth=0.5mm, Features="Automotive AEC-Q200", Height=0.35mm, Lead Free="Lead Free", Length=1mm, Military Standard=Not, Mount="Surface Mount", Number of Pins=2, Number of Terminations=2, Packaging="Tape and Reel", Power Rating=63mW, Radiation Hardening=No, Termination=SMD/SMT, Voltage Rating (DC)=50V, Weight=2.3E-05oz, Width=0.02inch
R14: library part CMP-2000-03845-2, "RES Thick Film, 10Ω, 1%, 0.1W, 100ppm/°C, 0603", Case Code (Imperial)=0603, Case Code (Metric)=1608, Max Operating Temperature=155°C, Max Power Dissipation=100mW, Min Operating Temperature=-55°C, Package Quantity=10, Resistance=10R, Temperature Coefficient=100ppm/°C, Tolerance=1%, Voltage Rating=75V, Case/Package=0603, Composition="Thick Film", Contact Plating=Tin, Depth=0.85mm, Features="Automotive AEC-Q200", Height=0.45mm, Lead Free="Lead Free", Length=1.55mm, Military Standard=Not, Mount="Surface Mount", Number of Pins=2, Number of Terminations=2, Packaging="Tape and Reel", Power Rating=100mW, Termination=SMD/SMT, Voltage Rating (DC)=75V, Weight=7.1E-05oz, Width=0.033inch
R15: library part CMP-07231-000006-1, "RES 0.01 OHM 1% 1/2W 0805", Manufacturer=Bourns, Package=CRF0805, Power Rating=0.5W, Resistance=10mΩ, Temperature="-55°C to +170°C", Temperature Coefficient=50ppm/°C, Temperature Range High=+170°C, Temperature Range Low=-55°C, Tolerance=1%, Automotive=Yes, Automotive Grade="Grade 0", Category=Res, ComponentLink2Description=Datasheet, ComponentLink2URL=https://www.bourns.com/docs/product-datasheets/crf.pdf?sfvrsn=616f91f1_24, Composition="Metal Element", Device Class L1="Passive Components", Device Class L2=Resistors, Device Class L3="Chip SMD Resistors", Digikey Description="RES 0.01 OHM 1% 1/2W 0805", Height=0.8mm, Ipc Land Pattern Name=RESC200125X60, Lead Free=Yes, Manufacturer Part Number=CRF0805-FZ-R010ELF, Mouser Description="Current Sense Resistors - SMD 0.010ohms 1% +/- 75PPM", Octopart=https://octopart.com/crf0805-fz-r010elf-bourns-75198941, RoHS=TRUE, Series=CRF
R16: library part CMP-2001-04189-2, "RES Thick Film, 5.11Ω, 1%, 0.125W, 100ppm/°C, 0805", Case Code (Imperial)=0805, Case Code (Metric)=2012, Max Operating Temperature=155°C, Max Power Dissipation=125mW, Min Operating Temperature=-55°C, Package Quantity=10, Resistance=5.11R, Temperature Coefficient=100ppm/°C, Tolerance=1%, Voltage Rating=150V, Case/Package=0805, Composition="Thick Film", Contact Plating=Tin, Depth=1.25mm, Features="Automotive AEC-Q200", Height=0.02inch, Lead Free="Lead Free", Length=2mm, Military Standard=Not, Mount="Surface Mount", Number of Pins=2, Number of Terminations=2, Packaging="Tape and Reel", Power Rating=125mW, Voltage Rating (DC)=150V, Weight=0.000194oz, Width=0.049inch, Working Voltage=150V
U1: library part CMP-0321-00904-2, "1 A, Single-Input, Single-Cell Li-Ion Battery Charger with Operation Over JEITA and 100 k ohm NTC, 4.5 V, -40 to 150 degC, 10-pin MSOP-PowerPAD (DGQ), Green (RoHS & no Sb/Br)", Manufacturer="Texas Instruments", Over Voltage Protection=N, Code_JEDEC=MO-187-BA-T, ComponentLink1Description=Datasheet, ComponentLink1URL=http://www.ti.com/general/docs/lit/getliterature.tsp?genericPartNumber=BQ24093&fileType=pdf, DatasheetVersion=SLUS968C, Eco-Plan="Green (RoHS & no Sb/Br)", Lead Acid=N, Li-Ion=N, Li-Polymer=N, Mounting Technology="Surface Mount", NiCd=N, NiMH=N, PackageDescription="10-Pin PowerPAD Plastic Small Outline 0.5 mm Pitch, Exposed Pad", PackageReference=DGQ0010D, PackageVersion="revF, Nov-2011", PartNumber=BQ24093DGQR, SubFamily="Battery Charge Management", Vin(Min)(V)=4.5
U2: library part CMP-0065-00073-3, "Switched Capacitor Voltage Converter, 6-pin SOT-23, Pb-Free", Manufacturer="Texas Instruments", PackageTopMarking=S10A*XTT, PowerWise=N, Code_IPC=SOT26A-6, Code_JEDEC=MO-178-AB, ComponentLink1Description="Datasheet URL", ComponentLink1URL=http://www.ti.com/general/docs/lit/getliterature.tsp?genericPartNumber=LM2681&fileType=pdf, CompType="Switch Caps", PackageDescription="Molded SOT-23, .115 x .063 x .040in Body, 6 Lead, .0375in in Pitch", PackageReference=DBV0006A, PinCount=6, RoHS=Y

## Via types
v1: diameter 50, hole 28, Top Layer to Bottom Layer, 26 vias
v2: diameter 19.68, hole 7.87, Top Layer to Bottom Layer, 5 vias

## Nets (pads, with @x,y where several pads share a name; then routed paths per layer and width w, separated by ;. In a path a pad name is that pad's centre, name@x,y a point inside that pad or via, vN(x,y) a via of type N, cw(c..) or ccw(c..) an arc to the next point about the centre after c; other vN are vias at no path point)
GND: B1.6 B1.11 B1.17 C3.1 C5.1 C6.1 C7.1 C9.1 C9.2 C10.2 C11.2 C12.2 C13.2 C14.2 C15.2 C16.1 C17.2 C18.2 C21.1 C22.1 C23.1 C24.1 C27.2 D4.1 D4.2 L1.2 Q1.2 R5.1 R6.1 R6.2 R7.1 R7.2 R8.1 R10.2 R12.1 R15.1 U2.2 U2.4 | length 4238.5
  Top Layer w10: v1(1040,1505) R8.1 ; v1(1105,1145) C17.2 ; C10.2@1123.29,1770.14 C10.2 1125.79,1769.21 1239.21,1769.21 C11.2 C12.2 1360.79,1769.21 1464.21,1769.21 C13.2 C14.2 ; v1(1265,1160) C18.2 ; v1(1455,1090) R10.2 ; v1(1760,1550) 1760,1588.82 1865.59,1694.41 B1.6 ; v1(1935,2415) C3.1 ; C15.2 2140.47,2135 2155.47,2120 C16.1 ; v1(1995,1310) C27.2 ; v1(2025,2530) 2030,2535 2030,2540 2042.6,2552.6 U2.2 ; v1(2065,1915) 2064.14,1914.14 2064.14,1905.86 2065.67,1904.33 B1.17 ; B1.11 2250.59,1694.41 2360,1585 2360,1545 v1(2355,1540) ; U2.4 2349.8,2515.2 2360,2505 v1(2360,2480) ; v1(2450,1050) R12.1 ; v1(2475,2440) C5.1 ; v1(2610,2450) R5.1 ; v1(2735,2460) C6.1 ; v1(2800,2485) 2800,2580 2825,2605 Q1.2 ; v1(3135,2490) C7.1 ; v1(3485,2130) 3485,2140 3485.63,2140.63 D4.1 ; v1(3975,2160) C9.2 ; C9.1 3975,2400 3925,2450 3883.58,2450 3859.06,2474.53 L1.2 3874.06,2510 4000,2510 4052.5,2457.5 4082.5,2457.5 ; v1(4140,2200) 4139.57,2200.43 R7.1 4090,2260 4065,2285 4065,2440 4082.5,2457.5 ; R6.1 4100,2475 4082.5,2457.5 ; R7.2 4240,2260 4285,2305 4285,2440 4250,2475 R6.2
  Bottom Layer w10: v1@2355,2470 2360,2475 v1(2360,2480)
Net_0: U1.9
Net_1: U1.7
Net_2: C1.1 C2.1 J1.5 R1.1 R2.1 U1.3 | length 513.5
  Top Layer w5: J1.5 v1@1268.82,2198.82
  Top Layer w10: v1@1268.82,2198.82 v1(1270,2200) ; v1(1325,2640) C1.1 ; v1(1435,2399.53) R1.1 ; v1(1460,2685) 1460,2695.82 1471.53,2707.35 1471.53,2710.04 1485.86,2724.37 1529.96,2724.37 1530.9,2725.32 1575,2725.32 ; v1(1530,2390) R2.1 ; v1(1765,2370) C2.1
Net_3: 
Net_4: 
Net_5: C2.2 C3.2 D3.2 J1.2 J1.3 R3.2 R4.1 U1.10 U2.1 | length 3051.4
  Top Layer w10: J1.3 1740,2250 1850,2360 1850,2490 1785,2555 1765,2555 ; J1.2 1727.16,2275.59 1820,2368.43 1820,2464.14 1814.14,2470 1775,2470 C2.2 1765,2555 ; R3.2 1805,3000 ; U1.10@1820,2765.59 1845,2790.59 1845,2960 1805,3000 ; C3.2 1935,2590 1905,2620 ; R4.1 1945.47,3000 1805,3000 ; D3.2 2120,2700 2040,2620 ; U2.1 2110,2590 2080,2620 2040,2620 ; 1765,2555 1765,2575 1810,2620 1905,2620 ; 1905,2620 2040,2620
NetB1_1: B1.1 C7.2 C10.1 C11.1 C12.1 C13.1 C14.1 C15.1 Q1.3 Q2.3 Q3.3 R9.2 | length 5121.4
  Top Layer w10: R9.2 1365,1505 1450,1590 1585,1590 1780,1785 1780,1855 ; C15.1 1760,2135 ; B1.1 1947.36,1825 1915,1825 1905,1835 1800,1835 1780,1855 ; Q2.3 3385,2540 3275,2650 C7.2 3145,2660 3145,2680 3120,2705 3090,2705 3030,2645 3030,2585 Q1.3 2950,2385 2855,2290 1825,2290 1445,1910 1130.86,1910 1125,1904.14 C10.1 1125.79,1822.36 1237.36,1822.36 1238.29,1821.44 C11.1 C12.1 1360.79,1822.36 1464.21,1822.36 C13.1 C14.1 1570,1995 1710,2135 1760,2135 ; 1760,2135 1760,1875 1780,1855
NetB1_2: B1.2 R8.2 R9.1 | length 1080.4
  Top Layer w10: R8.2 1207.99,1505 ; R9.1 1207.99,1505 ; B1.2 1890.46,1796.77 1882.23,1805 1845,1805 1575,1535 1500,1535 1400,1435 1230,1435 1210,1455 1210,1502.99 1207.99,1505
NetB1_3: B1.3 C17.1 | length 1096.5
  Top Layer w10: C17.1 1105,1390 1130,1415 1425,1415 1510,1500 1585,1500 1856.18,1771.18 B1.3
NetB1_4: B1.4 C18.1 | length 929.9
  Top Layer w10: C18.1 1265,1375 1280,1390 1428.28,1390 1508.28,1470 1583.28,1470 1858.87,1745.59 B1.4
NetB1_5: B1.5 R10.1 | length 746.8
  Top Layer w10: R10.1 1455,1385 1520,1450 1600,1450 1730.58,1580.58 1730.58,1587.69 1862.9,1720 B1.5
NetB1_7: B1.7 C19.1 C20.1 | length 1047.3
  Top Layer w10: C20.1 1633.64,1070 1585,1070 1570,1085 1570,1335 1610,1375 1655,1375 ; C19.1 1640,1268.43 1640,1345 1655,1360 1655,1375 ; B1.7 1873.82,1668.82 1810,1605 1810,1525 1745,1460 1675.86,1460 1670,1454.14 1670,1420 1655,1405 1655,1375
NetB1_9: B1.9 B1.16 C16.2 C21.2 C22.2 C23.2 C24.2 L2.2 Q2.2 R14.2 | length 9328.4
  Top Layer w10: B1.9 2161.16,1643.23 2157.3,1639.37 2157.3,1577.3 2105,1525 1950,1525 1895,1470 1895,1340 2025,1210 2175,1210 2230,1265 2705,1265 2745,1225 3430,1225 3490,1285 3490,1530 3455,1565 3375,1565 3320,1620 3320,1875 ; B1.16 2201.52,1822.36 2205.37,1826.22 2205.37,2015.37 2245,2055 2245,2065 2260,2080 2260,2195 ; C16.2 2213.61,2148.61 2260,2195 ; R14.2 3730,1155 4240,1665 4240,1895 ; L2.2 3258.31,1875 3289.15,1875 ; Q2.2@3335,2473.48 Q2.2 3334.33,2465.67 3334.33,2500.67 3310,2525 3255,2525 3205,2475 3205,2330 3465,2070 4160,2070 4240,1990 4240,1895 ; 2260,2195 2335,2270 2600,2270 2775,2095 3150,2095 3250,1995 3280,1995 3289.15,1985.85 3289.15,1875 ; 3289.15,1875 3320,1875 ; 3320,1875 3453.78,1875 C21.2 3489.68,1891.22 3524.06,1925.59 3524.06,1974.06 3550,2000 3625,2000 3655,1970 C22.2 3665.86,1900.46 3683.59,1918.18 3683.59,1973.59 3715,2005 3820,2005 3860,1965 C23.2 3870.86,1920.23 3888.59,1937.96 3888.59,1958.59 3935,2005 4105,2005 4145,1965 C24.2 4209.77,1925.23 4240,1895
NetB1_10: B1.10 C27.1 | length 520.8
  Top Layer w10: C27.1 2145.33,1457.83 2222.5,1535 2255,1535 2285,1565 2285,1630 2246.18,1668.82 B1.10 B1.10@2182.52,1670
NetB1_12: B1.12 C25.1 D5.1 D5.3 R15.2 | length 2262.3
  Top Layer w10: B1.12@2190,1721.73 2191.73,1720 2280,1720 2529.57,1470.43 2645,1470.43 2660,1455.43 D5.1 2660,1390 2645,1375 2480,1375 2423.74,1431.26 R15.2 2221.26,1415 2314.14,1415 2320,1409.14 2320,1360 2385,1295 2730,1295 2759.62,1265.38 2767.9,1265.38 2860,1357.48 D5.3 2865.75,1400.71 C25.1
NetB1_13: B1.13 C26.2 D5.4 L2.1 Q3.1 R16.1 | length 2760.3
  Top Layer w10: B1.13 2285.59,1745.59 2540,2000 2565,2000 ; C26.2 2285,2155 2284.14,2155.86 2284.14,2164.14 2305,2185 ; Q3.1 2305,2185 ; D5.4 2790,1840 2790,2000 ; L2.1 3110.85,1870 ; R16.1 3360,1530 3110.85,1779.15 3110.85,1870 ; 2305,2185 2370,2250 2510,2250 2565,2195 2565,2000 ; 2565,2000 2790,2000 ; 2790,2000 3015,2000 3040,1975 3040,1885 3055,1870 3110.85,1870
NetB1_14: B1.14 Q3.2 | length 597.1
  Top Layer w10: B1.14 2256.18,1771.18 2395,1910 2395,1985 2395.86,1985.86 2316.72,2065 2315.86,2065 2310,2070.86 2310,2100 2345,2135 Q3.2
NetB1_15: B1.15 C26.1 | length 208.1
  Top Layer w10: B1.15 2241.77,1796.77 2275,1830 2275,1916.61 2284.76,1926.38 C26.1
NetC1_2: C1.2 J1.1 U1.1 | length 1258.4
  Top Layer w10: J1.1 1601.18,2301.18 1670,2370 1670,2671.96 1659.09,2682.87 1659.09,2755.54 1645,2769.64 1645,2770 ; C1.2 1335,2774.53 1335,2805 1350,2820 1385,2820 1440,2765 1507.92,2765 1508.23,2765.32 1576.15,2765.32
NetC4_1: C4.1 U2.3 | length 348.9
  Top Layer w10: C4.1 2054.53,2380.47 2030,2405 2030,2450 2095.2,2515.2 U2.3
NetC4_2: C4.2 U2.6 | length 246.8
  Top Layer w10: C4.2 2135,2440.51 2149.69,2455.2 2183.27,2455.2 2229.27,2501.2 2229.27,2533.4 2279.06,2583.19 2293.19,2583.19 U2.6
NetC5_2: C5.2 C6.2 D3.1 Q1.1 R5.2 U2.5 | length 1423.2
  Top Layer w10: D3.1 2231.1,2833.9 2370,2695 2370,2552.6 ; U2.5 2370,2552.6 ; Q1.1 2945,2700 2855,2700 2840,2715 2840,2735 2815,2760 2790,2760 2760,2730 2760,2624.53 2755.59,2620.12 2755.59,2614.21 2740.91,2599.53 C6.2 2735,2635 2715,2655 2675.87,2655 2614.92,2594.06 R5.2 2610,2635 2600,2645 2550,2645 2510.2,2605.2 2489.69,2605.2 2475,2590.51 C5.2 2419.53,2589.53 2382.6,2552.6 2370,2552.6
NetC20_2: C20.2 R11.1 | length 203.6
  Top Layer w10: C20.2 1740,1065 1750,1055 R11.1
NetC25_2: C25.2 R16.2 | length 273.1
  Top Layer w10: C25.2 3150.71,1440 3215,1440 3230,1425 3230,1385 3265,1350 3355,1350 R16.2
NetD1_1: D1.1 U1.5 | length 1638
  Top Layer w10: D1.1@1508.7,2995.86 1516.1,3003.26 D1.1 1275,3005 1250,2980 1250,2475 1390,2335 1595,2335 1650,2390 1650,2515 1540,2625 1540,2665 1559.37,2684.37 1575,2684.37
NetD1_2: D1.2 R3.1 | length 113.6
  Top Layer w10: D1.2 1608.9,3000 R3.1
NetD2_1: D2.1 U1.8 | length 134.9
  Top Layer w10: 1832.74,2725.6 1833.34,2725 1870.04,2725 1936.1,2791.06 D2.1
NetD2_2: D2.2 R4.2 | length 298.1
  Top Layer w10: R4.2@2009.53,3009.92 R4.2 2050,3005 2070,2985 2070,2815 2050,2795 D2.2
NetD4_3: D4.3 L1.1 Q2.1 | length 776
  Top Layer w10: Q2.1 3285,2415 3330,2370 3440,2370 3565,2495 L1.1 3640.94,2365.94 3610,2335 3540,2335 3525,2320 D4.3
NetR1_2: R1.2 U1.2 | length 348.9
  Top Layer w10: R1.2 1435,2615.19 1420,2630.19 1420,2705 1460,2745 1517.34,2745 1517.66,2745.32 1575,2745.32
NetR2_2: R2.2 U1.4 | length 244.9
  Top Layer w10: R2.2 1530,2570 1500,2600 1500,2655 1549.37,2704.37 1575.72,2704.37 1576.66,2705.32
NetR13_2: B1.8 C19.2 R11.2 R12.2 R13.1 R13.2 R14.1 | length 2303.1
  Top Layer w10: C19.2 1785,1265 1919.23,1130.77 R11.2@1919.23,1055.53 ; R11.2 R11.2@1919.23,1055.53 ; B1.8 1881.77,1643.23 1830,1591.46 1830,1245 1975,1100 1979.14,1100 1985,1094.14 1985,1065 ; R13.2 2845,1170.08 2840.78,1174.3 2840.7,1174.3 2840,1175 2715,1175 2667.56,1222.44 R12.2 2447.44,1225 2315,1225 2155,1065 1985,1065 ; R13.1 2935,1170 2960,1145 3047.9,1145 R14.1 ; R11.2@1919.23,1055.53 1928.7,1065 1985,1065
pads on no net: J1.4 J1.6 J1.7 J1.8 J1.9 J1.10 J1.11 U1.6 U1.11
copper on no net:
  other v2: 1687.28,2701.38 1722.72,2701.38 1705,2725 1687.28,2748.62 1722.72,2748.62

## Silkscreen, mask and mechanical layers (free items; w line width, h text height)
Top Overlay:
  the board outline again, w10

## Text inside footprints (layer, text, board x,y; h text height)
J1: Mechanical 1 "PCB EDGE" at 1025,1980 h39.37 r270